# Altium PCB Driver.PcbDoc
Units mm, origin at the board's own origin, x right, y up, seen from the top; angles counter-clockwise.
Board outline 292.75 x 147.5 mm, 2 copper layers (Top Layer, Bottom Layer); 109 components, 164 nets, 482 pads, 0 vias.
Unrouted connection lines stored in the file: 143.
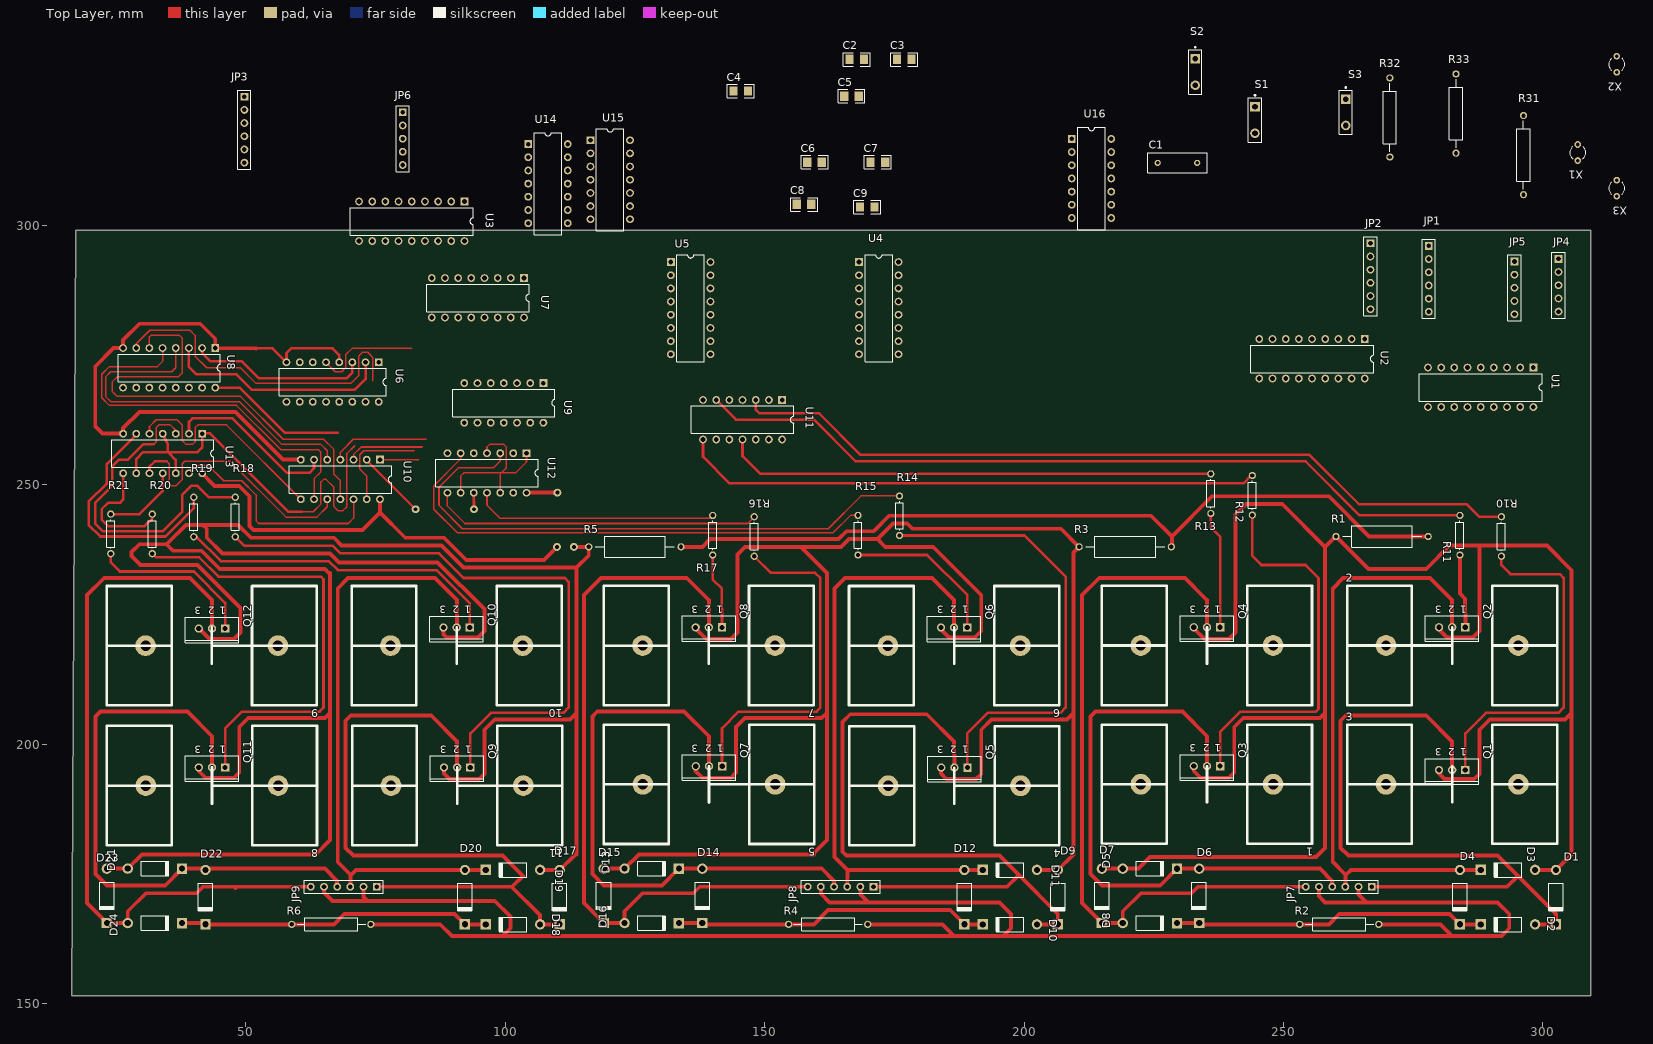
[diagram p0: Top Layer view]
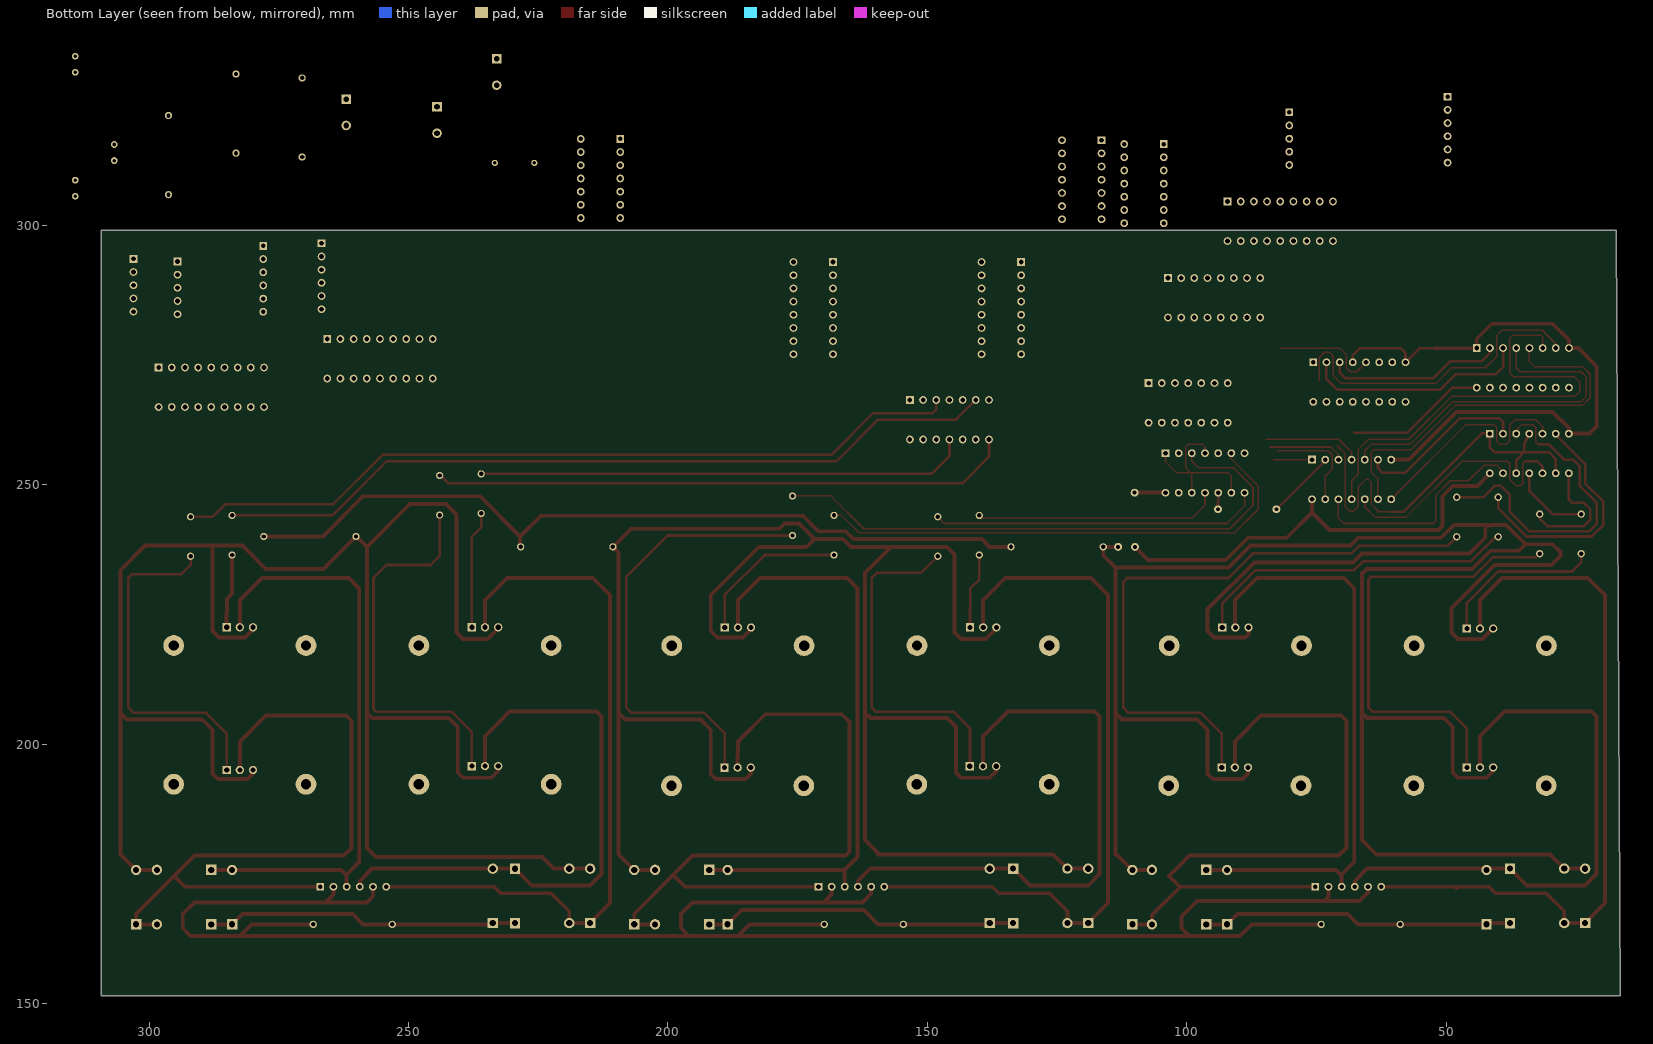
[diagram p1: Bottom Layer view, seen from below]

## Layer stack, top to bottom
Top Layer: signal copper 0.0356
Dielectric: dielectric 0.32, FR-4, Dk 4.8
Bottom Layer: signal copper 0.0356

## Board outline
17.25,299 309.25,299 309.25,151.5 16.5,151.5

## Design rules (kind name [scope] priority, off if disabled: settings)
Clearance [All] p1: gap=0.254
ComponentClearance [All] p1: gap=0.254 collisioncheckmode=0
PolygonConnect [All] p1: connectstyle=Relief reliefconductorwidth=0.254 reliefentries=4 polygonreliefangle="90 Angle"
RoomDefinition Driver [InComponentClass('Driver')] p1: confinementstyle=ConfineIn formatcopy=TRUE outline 225.262,383.686 276.062,383.686 276.062,409.086 225.262,409.086
RoutingLayers [All] p1: top layer=Any bottom layer="Not Used"
RoutingVias [All] p1: holewidth=0.711 width=1.27 viastyle="Through Hole" minholewidth=0.711 minwidth=1.27 maxholewidth=0.711 maxwidth=1.27
SolderMaskExpansion [All] p1: expansion=0.102
TestPointUsage [All] p1: valid=0 allowmultiple=FALSE
Testpoint [All] p1: side=15 testpointundercomponent=TRUE minsize=1.016 maxsize=2.54 preferedsize=1.524 minholesize=0 maxholesize=1.016 preferedholesize=0.813 testpointgrid=0.025 style=1023 order=-539222988
Width [All] p1: maxlimit=25 minlimit=0.254 preferedwidth=0.254 toplayer_prefwidth=0.5 bottomlayer_maxwidth=2.54 minimp=50.000000 maximp=50.000000 favimp=50.000000
16 further rules are at their usual default settings.

## Components (designator, comment, footprint, x,y, rotation, side; value= is the part's Value field where it differs from the comment)
1 "" "Heat Sink" 258,202.25 r180 top
2 "" "Heat Sink" 259.75,209 r0 top
3 "" "Heat Sink" 259.75,182.25 r0 top
4 "" "Heat Sink" 209.322,201.962 r180 top
5 "" "Heat Sink" 162.04,202.232 r180 top
6 "" "Heat Sink" 209.268,228.962 r180 top
7 "" "Heat Sink" 162.002,228.982 r180 top
8 "" "Heat Sink" 66.25,202 r180 top
9 "" "Heat Sink" 66.214,228.954 r180 top
10 "" "Heat Sink" 113.402,228.962 r180 top
11 "" "Heat Sink" 113.5,202 r180 top
C1 "" RAD-0.3 225.75,312 r0 top
C2 "PIC16C84-04/P" C3216-1206 167.762,331.96 r0 top
C3 "PIC16C84-04/P" C3216-1206 176.906,331.96 r0 top
C4 "XTAL" C3216-1206 145.41,325.864 r0 top
C5 "XTAL" C3216-1206 166.746,324.848 r0 top
C6 "XTAL" C3216-1206 159.634,312.148 r0 top
C7 "XTAL" C3216-1206 171.826,312.148 r0 top
C8 "XTAL" C3216-1206 157.602,304.02 r0 top
C9 "XTAL" C3216-1206 169.794,303.512 r0 top
D1 "1N4004" DIO10.46-5.3x2.8 302.5,170.5 r270 top
D2 "1N4004" DIO10.46-5.3x2.8 293.25,165.25 r180 top
D3 "1N4004" DIO10.46-5.3x2.8 293.25,175.75 r180 top
D4 "1N4004" DIO10.46-5.3x2.8 284,170.5 r270 top
D5 "1N4004" DIO10.46-5.3x2.8 224.25,175.98 r0 top
D6 "1N4004" DIO10.46-5.3x2.8 233.75,170.75 r270 top
D7 "1N4004" DIO10.46-5.3x2.8 215,170.75 r270 top
D8 "1N4004" DIO10.46-5.3x2.8 224.25,165.5 r0 top
D9 "1N4004" DIO10.46-5.3x2.8 206.5,170.5 r270 top
D10 "1N4004" DIO10.46-5.3x2.8 197.25,165.25 r180 top
D11 "1N4004" DIO10.46-5.3x2.8 197.25,175.75 r180 top
D12 "1N4004" DIO10.46-5.3x2.8 188.5,170.5 r270 top
D13 "1N4004" DIO10.46-5.3x2.8 128.25,176 r0 top
D14 "1N4004" DIO10.46-5.3x2.8 138,170.75 r270 top
D15 "1N4004" DIO10.46-5.3x2.8 119,170.75 r270 top
D16 "1N4004" DIO10.46-5.3x2.8 128.25,165.5 r0 top
D17 "1N4004" DIO10.46-5.3x2.8 110.5,170.5 r270 top
D18 "1N4004" DIO10.46-5.3x2.8 101.5,165.25 r180 top
D19 "1N4004" DIO10.46-5.3x2.8 101.5,175.75 r180 top
D20 "1N4004" DIO10.46-5.3x2.8 92.25,170.5 r270 top
D21 "1N4004" DIO10.46-5.3x2.8 32.5,176 r0 top
D22 "1N4004" DIO10.46-5.3x2.8 42.25,170.5 r270 top
D23 "1N4004" DIO10.46-5.3x2.8 23.25,170.75 r270 top
D24 "1N4004" DIO10.46-5.3x2.8 32.5,165.5 r0 top
JP1 "Header 6" HDR1X6 278,296 r270 top
JP2 "Header 6" HDR1X6 266.75,296.5 r270 top
JP3 "Header 6" HDR1X6 49.75,324.75 r270 top
JP4 "Header 5" HDR1X5 303,293.5 r270 top
JP5 "Header 5" HDR1X5 294.5,293 r270 top
JP6 "Header 5" HDR1X5 80.25,321.75 r270 top
JP7 "Header 6" HDR1X6 267,172.5 r180 top
JP8 "Header 6" HDR1X6 171,172.5 r180 top
JP9 "Header 6" HDR1X6 75.25,172.5 r180 top
Q1 "MJE15030" SFM-T3/X1.6V 282.5,195 r180 top
Q2 "MJE15030" SFM-T3/X1.6V 282.5,222.5 r180 top
Q3 "MJE15030" SFM-T3/X1.6V 235.25,195.75 r180 top
Q4 "MJE15030" SFM-T3/X1.6V 235.25,222.5 r180 top
Q5 "MJE15030" SFM-T3/X1.6V 186.572,195.462 r180 top
Q6 "MJE15030" SFM-T3/X1.6V 186.518,222.462 r180 top
Q7 "MJE15030" SFM-T3/X1.6V 139.29,195.732 r180 top
Q8 "MJE15030" SFM-T3/X1.6V 139.252,222.482 r180 top
Q9 "MJE15030" SFM-T3/X1.6V 90.75,195.5 r180 top
Q10 "MJE15030" SFM-T3/X1.6V 90.652,222.462 r180 top
Q11 "MJE15030" SFM-T3/X1.6V 43.5,195.5 r180 top
Q12 "MJE15030" SFM-T3/X1.6V 43.5,222.25 r180 top
R1 "" AXIAL-0.7 269,240 r0 top
R2 "" AXIAL-0.6 260.75,165.25 r0 top
R3 "Rsense" AXIAL-0.7 219.5,238 r0 top
R4 "1N4004" AXIAL-0.6 162.25,165.25 r0 top
R5 "Rsense" AXIAL-0.7 125,238 r0 top
R6 "1N4004" AXIAL-0.6 66.5,165.25 r0 top
R10 "1K" AXIAL-0.3 292,240 r270 top
R11 "1K" AXIAL-0.3 284,240.25 r270 top
R12 "1K" AXIAL-0.3 244,247.94 r270 top (schematic designator R11)
R13 "NPN3" AXIAL-0.3 236,248.25 r90 top
R14 "1K" AXIAL-0.3 176,244 r270 top
R15 "1K" AXIAL-0.3 168,240.25 r270 top (schematic designator R18)
R16 "Res1" AXIAL-0.3 148,240 r270 top (schematic designator R13)
R17 "Res1" AXIAL-0.3 140,240.25 r90 top (schematic designator R13)
R18 "NPN3" AXIAL-0.3 48,243.75 r270 top
R19 "1K" AXIAL-0.3 40,243.75 r270 top (schematic designator R18)
R20 "1K" AXIAL-0.3 32,240.5 r270 top (schematic designator R18)
R21 "1K" AXIAL-0.3 24,240.5 r270 top (schematic designator R18)
R31 "Res Adj2" AXIAL-0.6 296.25,313.5 r270 top
R32 "Res Adj2" AXIAL-0.6 270.5,320.75 r270 top
R33 "Res Adj2" AXIAL-0.6 283.25,321.5 r270 top
S1 "Home" SPST-2 244.5,320.25 r270 top
S2 "Home" SPST-2 233,329.5 r270 top
S3 "Home" SPST-2 262,321.75 r270 top
U1 "PIC16C84-04/P" DIP-18 288,268.75 r180 top
U2 "PIC16C84-04/P" DIP-18 255.5,274.25 r180 top
U3 "PIC16C84-04/P" DIP-18 82,300.75 r180 top
U4 "DM74LS191N" DIP-16 172,284 r270 top
U5 "DM74LS191N" DIP-16 135.75,284 r270 top
U6 "DM74LS191N" DIP-16 66.75,269.75 r180 top
U7 "SN74LS139AN" DIP-16/X1.5 94.75,286 r180 top
U8 "SN74LS139AN" DIP-16/X1.5 35.25,272.5 r180 top
U9 "SN74LS04N" DIP-14/D19.7 99.75,265.75 r180 top
U10 "SN74LS04N" DIP-14/D19.7 68.25,251 r180 top
U11 "SN74LS08N" DIP-14/D19.7 145.75,262.5 r180 top
U12 "SN74LS08N" DIP-14/D19.7 96.5,252.25 r180 top
U13 "SN74LS08N" DIP-14/D19.7 34,256 r180 top
U14 "SN74LS08N" DIP-14/D19.7 108.25,308 r270 top
U15 "LM339N" DIP-14/D19.7 120.25,308.75 r270 top
U16 "DM74LS05N" DIP-14/D19.7 213,309 r270 top
X1 "11.059MHz" BCY-W2/D3.1 306.708,313.994 r0 top
X2 "11.059MHz" BCY-W2/D3.1 314.224,330.998 r0 top
X3 "11.059MHz" BCY-W2/D3.1 314.224,307.122 r0 top
? "" "Heat Sink" 258,229 r180 top

## Footprints (in the part's own frame and the unit in brackets; to place one, negate y for a bottom-side part, rotate by r counter-clockwise, add the part's x,y. Pads: shape width x height; smd on the part's side, far side on the other; paste and mask are expansions set on the pad)
AXIAL-0.3 [mm]
  round 1.4 hole 0.85: 1(-3.81,0) 2(3.81,0)
  silkscreen extent -2.77,-0.76 2.77,0.76
AXIAL-0.6 [mm]
  round 1.4 hole 0.85: 1(-7.62,0) 2(7.62,0)
  silkscreen extent -6.6,-1.27 6.6,1.27
AXIAL-0.7 [mm]
  round 1.4 hole 0.85: 1(-8.89,0) 2(8.89,0)
  silkscreen extent -7.62,-2.03 7.62,2.03
BCY-W2/D3.1 [mm]
  round 1.3 hole 0.7: 1(0,1.55) 2(0,-1.55)
  silkscreen extent -1.55,-1.19 1.55,1.17
C3216-1206 [mm]
  rect 1.6x1.8 smd: 1(-1.4,0) 2(1.4,0)
  silkscreen extent -2.6,-1.3 2.6,1.3
DIO10.46-5.3x2.8 [mm]
  round 2 hole 1.2: 1(-5.23,0)
  rect 2x2 hole 1.2: 2(5.23,0)
  silkscreen extent -2.65,-1.4 2.75,1.4
DIP-14/D19.7 [mm]
  rect 1.5x1.5 hole 0.9: 1(-7.62,-3.81)
  round 1.5 hole 0.9: 2(-5.08,-3.81) 3(-2.54,-3.81) 4(0,-3.81) 5(2.54,-3.81) 6(5.08,-3.81) 7(7.62,-3.81) 8(7.62,3.81) 9(5.08,3.81) 10(2.54,3.81) 11(0,3.81) 12(-2.54,3.81) 13(-5.08,3.81) 14(-7.62,3.81)
  silkscreen extent -9.85,-2.65 9.85,2.65
DIP-16 [mm]
  rect 1.5x1.5 hole 0.9: 1(-8.89,-3.81)
  round 1.5 hole 0.9: 2(-6.35,-3.81) 3(-3.81,-3.81) 4(-1.27,-3.81) 5(1.27,-3.81) 6(3.81,-3.81) 7(6.35,-3.81) 8(8.89,-3.81) 9(8.89,3.81) 10(6.35,3.81) 11(3.81,3.81) 12(1.27,3.81) 13(-1.27,3.81) 14(-3.81,3.81) 15(-6.35,3.81) 16(-8.89,3.81)
  silkscreen extent -10.3,-2.65 10.3,2.65
DIP-16/X1.5 [mm]
  rect 1.5x1.5 hole 0.9: 1(-8.89,-3.81)
  round 1.5 hole 0.9: 2(-6.35,-3.81) 3(-3.81,-3.81) 4(-1.27,-3.81) 5(1.27,-3.81) 6(3.81,-3.81) 7(6.35,-3.81) 8(8.89,-3.81) 9(8.89,3.81) 10(6.35,3.81) 11(3.81,3.81) 12(1.27,3.81) 13(-1.27,3.81) 14(-3.81,3.81) 15(-6.35,3.81) 16(-8.89,3.81)
  silkscreen extent -9.85,-2.65 9.85,2.65
DIP-18 [mm]
  rect 1.5x1.5 hole 0.9: 1(-10.16,-3.81)
  round 1.5 hole 0.9: 2(-7.62,-3.81) 3(-5.08,-3.81) 4(-2.54,-3.81) 5(0,-3.81) 6(2.54,-3.81) 7(5.08,-3.81) 8(7.62,-3.81) 9(10.16,-3.81) 10(10.16,3.81) 11(7.62,3.81) 12(5.08,3.81) 13(2.54,3.81) 14(0,3.81) 15(-2.54,3.81) 16(-5.08,3.81) 17(-7.62,3.81) 18(-10.16,3.81)
  silkscreen extent -11.85,-2.65 11.85,2.65
HDR1X5 [mm]
  rect 1.5x1.5 hole 0.9: 1(0,0)
  round 1.5 hole 0.9: 2(2.54,0) 3(5.08,0) 4(7.62,0) 5(10.16,0)
  silkscreen extent -1.27,-1.27 11.43,1.27
HDR1X6 [mm]
  rect 1.5x1.5 hole 0.9: 1(0,0)
  round 1.5 hole 0.9: 2(2.54,0) 3(5.08,0) 4(7.62,0) 5(10.16,0) 6(12.7,0)
  silkscreen extent -1.27,-1.27 13.97,1.27
"Heat Sink" [mm]
  round 4 hole 2: 0(35.5,10) 2(10,10)
  silkscreen extent 2.5,-1.5 43,21.5
RAD-0.3 [mm]
  round 1.2 hole 0.7: 1(0,0) 2(7.62,0)
  silkscreen extent -1.91,-1.9 9.52,1.91
SFM-T3/X1.6V [mm]
  rect 1.6x1.6 hole 1: 1(-2.54,0)
  round 1.6 hole 1: 2(0,0) 3(2.54,0)
  silkscreen extent -5.15,-2.2 5.15,2.7
SPST-2 [mm]
  rect 1.85x1.85 hole 1.1: 1(-2.54,0)
  round 1.85 hole 1.1: 2(2.54,0)
  silkscreen extent -4.89,-1.27 4.28,1.27

## Part data
D1 D2 D3 D4 D5 D6 D7 D8 D9 D10 D11 D12 D13 D14 D15 D16 D17 D18 D19 D20 D21 D22 D23 D24: "1.0 Ampere General Purpose Rectifier"
JP1 JP2 JP3 JP7 JP8 JP9: "Header, 6-Pin"
JP4 JP5 JP6: "Header, 5-Pin"
Q1 Q2 Q3 Q4 Q5 Q6 Q7 Q8 Q9 Q10 Q11 Q12: "Complementary Silicon Plastic Power Transistor"
R10 R13 R14 R15 R18 R19 R20 R21: library part Res1, "Resistor"
R11 R12: library part res1, "Resistor"
R16 R17: "Resistor"
R31 R32 R33: "Variable Resistor"
S1 S2 S3: library part SW-SPST, "Single-Pole, Single-Throw Switch"
U1 U2 U3: "EPROM-Based 8-Bit CMOS Microcontroller"
U4 U5 U6: "Synchronous 4-Bit Up/Down Counter with Mode Control"
U7 U8: "Dual 2-Line to 4-Line Decoder / Demultiplexer"
U9 U10: "Hex Inverter"
U11 U12 U13 U14: "Quadruple 2-Input Positive-AND Gate"
U15: "Quad Single-Supply Comparator"
U16: "Hex Inverter with Open-Collector Output"
X1 X2 X3: library part XTAL, "Crystal Oscillator"

## Free pads (board coordinates)
  round 1.524 hole 0.762: 0(113.25,238) 2(110,238) 3(110.06,248.44) 4(82.75,245.25) 5(94,245.25)

## Nets (pads, with @x,y where several pads share a name; then routed paths per layer and width w, separated by ;. In a path a pad name is that pad's centre, name@x,y a point inside that pad or via, vN(x,y) a via of type N, cw(c..) or ccw(c..) an arc to the next point about the centre after c; other vN are vias at no path point)
+5V: 
+5V: 
+5V: 
+5V: 
+5V: 
+5V: 
+5V: 
+5V: 
+12V: JP7.2 JP7.5 JP8.2 JP8.5 JP9.2 JP9.5 R2.2 R4.2 R6.2 | length 394.4
  Top Layer w0.75: JP9.5 65.09,171.41 66.75,169.75 73.5,169.75 ; JP9.2 72.71,170.54 73.5,169.75 ; R6.2 87.5,165.25 89.75,163 99.5,163 ; JP8.5 160.84,171.16 162.5,169.5 170,169.5 ; JP8.2 168.46,171.04 170,169.5 ; R4.2 184.25,165.25 186.5,163 ; JP7.5 256.84,170.66 258,169.5 266,169.5 ; JP7.2 264.46,171.04 266,169.5 ; R2.2 280.25,165.25 282.5,163 ; 73.5,169.75 98,169.75 101,166.75 101,164.5 99.5,163 ; 99.5,163 186.5,163 ; 170,169.5 195.25,169.5 197.5,167.25 197.5,164.5 196,163 ; 186.5,163 196,163 ; 196,163 282.5,163 ; 266,169.5 291.25,169.5 293.5,167.25 293.5,164.5 292,163 282.5,163
+12V: 
+12V: 
+12V: 
+12V: 
+12V: 
+12V: 
+12V: 
+12V: 
+12V: 
"CLOCK PIC1": JP1.6 U1.6
"CLOCK PIC2": JP2.6 U2.6
"CLOCK PIC3": JP3.6 U3.6
"COIL OFF": U1.12 U2.12 U3.12 U14.1 U14.4 U14.9
"DATA IN PIC1": JP1.5 U1.7
"DATA IN PIC2": JP2.5 U2.7
"DATA IN PIC3": JP3.5 U3.8
"DATA OUT PIC1": JP1.2 U1.9
"DATA OUT PIC2": JP2.2 U2.9
"DATA OUT PIC3": JP3.2 U3.7
GND: C1.1 C2.1 C3.1 C4.1 C5.1 C6.1 C7.1 C8.1 C9.1 R1.2 R3.2 R5.2 R31.1 R32.1 R33.1 S1.1 S2.1 S3.1 U1.5 U2.5 U3.5 U4.4 U4.8 U5.4 U5.8 U6.4 U6.8 U7.1 U7.8 U7.15 U8.1 U8.8 U9.7 U10.7 U11.7 U12.7 U13.7 U14.7 U15.12 U16.7 | length 273.6
  Top Layer w0.5: 52,276.25 55.17,276.25 U6.8 57.86,275.36 58.75,276.25 66.75,276.25 68.02,274.98 U6.4
  Top Layer w0.75: 52,276.25 U8.1 44.14,278.11 41.25,281 29.5,281 26.36,277.86 U8.8 24.56,276.31 21,272.75 21,261.19 21.06,261.19 22.44,259.81 U13.7 26.38,260.88 29.5,264 48,264 57.19,254.81 U10.7 ; R5.2 138,238 139.5,239.5 164.25,239.5 165.75,241 171,241 ; 171.25,241.25 174,244 224.5,244 228.5,240 ; R3.2@228.5,238.11 228.5,240 ; R1.2 266.5,240 258.75,247.75 236.25,247.75 228.5,240
"HOME PIC1": JP1.3 U1.13
"HOME PIC2": JP2.3 U2.13
"HOME PIC3": JP3.3 U3.9
NetB1A_1: D3.2 D4.1 JP7.3 Q2.2 | length 115.6
  Top Layer w0.75: JP7.3 261.92,174.67 262,174.75 ; Q2.2@282.5,222.75 282.5,227.75 278.25,232 261.5,232 259.5,230 259.5,177.25 262,174.75 ; D4.1 D4.1@284,175.75 ; D3.2 D4.1@284,175.75 ; 262,174.75 263,175.75 D4.1@284,175.75
NetB1A_2: D1.2 D2.1 JP7.1 Q1.2 | length 135.8
  Top Layer w0.75: JP7.1 293.1,172.5 295.175,174.575 ; Q1.2 282.5,200.5 277.5,205.5 262,205.5 261,204.5 261,180 262.5,178.5 291.25,178.5 295.175,174.575 ; D2.1 302.48,165.25 D1.2 302.5,167.25 295.175,174.575
NetB1B_1: D7.2 D8.1 JP7.6 Q4.2 | length 140.7
  Top Layer w0.75: Q4.2 235.25,227.75 235,228 231,232 214.5,232 211.188,228.688 211.188,169.332 D7.2 219,165.52 D8.1 219.02,167.77 222.5,171.25 232.25,171.25 233.5,172.5 JP7.6
NetB1B_2: D5.2 D6.1 JP7.4 Q3.2 | length 111.8
  Top Layer w0.75: Q3.2 235.25,201.5 230.5,206.25 213.75,206.25 212.815,205.315 212.815,174.935 215,172.75 226.25,172.75 D5.2 D6.1 257.02,175.98 259.38,173.62 JP7.4
NetB2A_1: D11.2 D12.1 JP8.3 Q6.2 | length 115.5
  Top Layer w0.75: JP8.3 166,175.75 ; Q6.2 186.518,227.732 182.25,232 165.5,232 163.5,230 163.5,178.25 166,175.75 ; D12.1 D12.1@188.5,175.75 ; D11.2 D12.1@188.5,175.75 ; 166,175.75 D12.1@188.5,175.75
NetB2A_2: D9.2 D10.1 JP8.1 Q5.2 | length 135.7
  Top Layer w0.75: JP8.1 196.744,172.5 198.997,174.753 ; Q5.2 186.5,200.5 181.25,205.75 166.5,205.75 165,204.25 165,179.25 165.75,178.5 195.25,178.5 198.997,174.753 ; D10.1 206.48,165.25 D9.2 206.5,167.25 198.997,174.753
NetB2B_1: D15.2 D16.1 JP8.6 Q8.2 | length 140.7
  Top Layer w0.75: Q8.2 139.25,222.5 139.25,227.75 139,228 135,232 118.5,232 115.188,228.688 115.188,169.332 D15.2 123,165.52 D16.1 123.02,167.77 126.5,171.25 136.25,171.25 137.5,172.5 JP8.6
NetB2B_2: D13.2 D14.1 JP8.4 Q7.2 | length 111.9
  Top Layer w0.75: D13.2 D13.2@133.48,175.98 ; Q7.2 139.25,195.75 139.25,201.5 134.5,206.25 117.75,206.25 116.815,205.315 116.815,174.935 119,172.75 130.25,172.75 130.25,172.77 133.46,175.98 D13.2@133.48,175.98 ; JP8.4 163.38,173.62 161.02,175.98 D14.1 D13.2@133.48,175.98
NetB3A_1: D19.2 D20.1 JP9.3 Q10.2 | length 115.7
  Top Layer w0.75: JP9.3 70.17,174.67 ; Q10.2@90.75,222.75 90.75,227.75 86.5,232 69.75,232 67.75,230 67.75,177.25 70.25,174.75 70.17,174.67 ; D20.1 D20.1@92.25,175.75 ; D19.2 D20.1@92.25,175.75 ; 70.17,174.67 71.25,175.75 D20.1@92.25,175.75
NetB3A_2: D17.2 D18.1 JP9.1 Q9.2 | length 132.9
  Top Layer w0.75: JP9.1 101.35,172.5 ; Q9.2@90.75,195 Q9.2 90.75,200.5 85.75,205.5 70.25,205.5 69.25,204.5 69.25,180 70.75,178.5 99.5,178.5 103.425,174.575 101.35,172.5 ; D17.2 D17.2@110.5,165.25 ; D17.2@110.73,165.25 D17.2@110.5,165.25 ; 101.35,172.5 101.35,172.4 106.73,167.02 D18.1 D17.2@110.5,165.25
NetB3B_1: D23.2 D24.1 JP9.6 Q12.2 | length 141
  Top Layer w0.75: D24.1@27.25,165.52 D23.2 19.438,169.332 19.438,228.688 22.75,232 39.25,232 43.5,227.75 Q12.2@43.5,222.5 ; D24.1 27.27,167.77 30.75,171.25 40.5,171.25 41.75,172.5 48,172.5 ; 48,172.25 48,172.5 ; JP9.6 48,172.5
NetB3B_2: D21.2 D22.1 JP9.4 Q11.2 | length 111.8
  Top Layer w0.75: D21.2 D21.2@37.73,175.98 ; Q11.2@43.5,195.75 43.5,201.5 38.75,206.25 22,206.25 21.065,205.315 21.065,174.935 23.25,172.75 34.5,172.75 D21.2@37.73,175.98 ; JP9.4 67.63,173.62 65.27,175.98 42.25,175.98 D21.2@37.73,175.98
NetC4_2: C4.2 U1.15 X1.2
NetC5_2: C5.2 U1.16 X1.1
NetC6_2: C6.2 U2.15 X2.2
NetC7_2: C7.2 U2.16 X2.1
NetC8_2: C8.2 U3.15 X3.2
NetC9_2: C9.2 U3.16 X3.1
NetD1_1: D1.1 D3.1 D5.1 D7.1 Q1.3 Q2.3 Q3.3 Q4.3 R1.1 U15.4 | length 373.5
  Top Layer w0.75: D7.1 D5.1 219.02,176.02 222.02,176.02 224.25,178.25 256.25,178.25 258,180 258,238 ; Q3.3 232.71,194.79 234,193.5 239.5,193.5 240.5,194.5 240.5,203.25 242.25,205 257,205 258,206 ; Q4.3 232.71,222.29 234.75,220.25 239.5,220.25 240.75,221.5 240.75,240 240.75,244.25 242.75,246.25 249.75,246.25 258,238 ; Q1.3@279.96,194.29 281,193.25 286.75,193.25 287.75,194.25 287.75,202.75 289.75,204.75 304.25,204.75 305.5,206 ; Q2.3 279.96,222.04 281.5,220.5 286.5,220.5 287.75,221.75 287.75,238.25 ; D3.1 D1.1@302.48,175.75 ; D1.1 302.5,175.75 305.5,178.75 305.5,233.5 300.75,238.25 282,238.25 277.5,233.75 266.36,233.75 R1.1 260,240 258,238
NetD2_2: D2.2 D4.2 D6.2 D8.2 R2.1 | length 60.7
  Top Layer w0.75: D8.2 233.73,165.5 233.98,165.25 R2.1 ; R2.1@252.88,165.5 R2.1 ; D2.2 284.02,165.25 D4.2 282.02,167.25 260.75,167.25 258.75,165.25 R2.1
NetD9_1: D9.1 D11.1 D13.1 D15.1 Q5.3 Q6.3 Q7.3 Q8.3 R3.1 U15.6 | length 381.7
  Top Layer w0.75: D15.1 123,175.98 D13.1 125.77,178.75 ; 125.75,178.75 159.5,178.75 ; Q8.3@136.71,222.29 138.75,220.25 143.5,220.25 144.75,221.5 144.75,236.5 146.25,238 164.75,238 166.25,239.5 171.75,239.5 ; Q7.3 136.71,195.75 136.71,195.732 136.71,194.79 138,193.5 143.5,193.5 144.5,194.5 144.5,203.25 146.25,205 161,205 162,206 ; 157,238 162,233 162,181.5 159.25,178.75 ; Q6.3@183.96,222.04 185.5,220.5 190.5,220.5 191.75,221.75 191.75,228.75 182.5,238 173.25,238 171.75,239.5 ; Q5.3 183.96,195.39 183.96,194.29 185,193.25 190.75,193.25 191.75,194.25 191.75,202.75 193.75,204.75 208.25,204.75 209.5,206 ; D11.1 206.48,175.75 D9.1 206.5,175.75 209.5,178.75 209.5,206 ; 171.75,239.5 174.75,242.5 177.5,242.5 178.5,241.5 207.11,241.5 R3.1 209.5,236.89 209.5,234.5 209.5,206
NetD10_2: D10.2 D12.2 D14.2 D16.2 R4.1 | length 60.9
  Top Layer w0.75: D16.2 137.98,165.5 138.23,165.25 R4.1 159.5,165.25 162.25,168 185.77,168 D12.2 188.52,165.25 D10.2
NetD17_1: D17.1 D19.1 D21.1 D23.1 pad.0 Q9.3 Q10.3 Q11.3 Q12.3 R5.1 U15.8 | length 483.9
  Top Layer w0.75: D23.1 27.27,175.98 D21.1 27.27,176.02 30,178.75 63.5,178.75 66.25,181.5 66.25,206 ; Q11.3 40.96,194.79 42.25,193.5 47.75,193.5 48.75,194.5 48.75,203.25 50.5,205 65.25,205 66.25,206 ; Q12.3 40.96,222.29 40.98,222.27 43,220.25 47.75,220.25 49,221.5 49,226.25 40.75,234.5 29.75,234.5 28,236.25 28,237 29.5,238.5 34.75,238.5 ; 41.75,242.25 42.5,241.5 42.5,239.75 45.5,236.75 66.25,236.75 68,235 87,235 96,226 96,221.75 94.75,220.5 88.75,220.5 88.112,221.138 Q10.3 ; Q9.3 88.21,194.29 89.25,193.25 95,193.25 96,194.25 96,202.75 98,204.75 112.5,204.75 113.75,206 ; D19.1 D17.1@110.5,175.75 ; D17.1 D17.1@110.5,175.75 ; pad.0 R5.1 116.11,236.36 113.75,234 ; 34.75,238.5 38.5,242.25 48.5,242.25 51,239.75 67,239.75 68.5,238.25 87.75,238.25 92,234 113.75,234 ; 34.75,238.5 36,237.25 41.5,237.25 45,233.75 65.25,233.75 66,233 66.25,233 66.25,206 ; D17.1@110.5,175.75 110.52,175.75 113.52,178.75 113.75,178.75 113.75,206 ; 113.75,206 113.75,232.25 113.75,234
NetD18_2: D18.2 D20.2 D22.2 D24.2 R6.1 | length 59.9
  Top Layer w0.75: D24.2 D22.2@41.98,165.5 ; D22.2@42.23,165.25 D22.2@42.25,165.25 ; D22.2 D22.2@42.25,165.25 ; D20.2 90.27,167.25 69,167.25 67,165.25 R6.1 D22.2@42.25,165.25 ; D20.2@92.27,165.25 D18.2
NetJP4_1: JP4.1 U1.3
NetJP4_2: JP4.2 U1.2
NetJP4_3: JP4.3 U1.1
NetJP4_4: JP4.4 U1.18
NetJP4_5: JP4.5 U1.17
NetJP5_1: JP5.1 U2.3
NetJP5_2: JP5.2 U2.2
NetJP5_3: JP5.3 U2.1
NetJP5_4: JP5.4 U2.18
NetJP5_5: JP5.5 U2.17
NetJP6_1: JP6.1 U3.3
NetJP6_2: JP6.2 U3.2
NetJP6_3: JP6.3 U3.1
NetJP6_4: JP6.4 U3.18
NetJP6_5: JP6.5 U3.17
NetQ1_1: C1.2 C2.2 C3.2 Q1.1 R10.2 U1.14 U2.14 U3.14 U5.16 | length 67.8
  Top Layer w0.5: Q1.1 285.04,202.04 289,206 303,206 304,207 304,230.5 304,232 303.25,232.75 293.75,232.75 292,234.5 R10.2
NetQ1_2: 
NetQ2_1: Q2.1 R11.2 | length 14.4
  Top Layer w0.75: R11.2 284,229 285,228 Q2.1
NetQ2_2: 
NetQ3_1: Q3.1 R12.2 | length 75
  Top Layer w0.5: Q3.1 237.79,202.29 241.75,206.25 256.25,206.25 256.75,206.75 256.75,232 254.25,234.5 245.75,234.5 244,236.25 R12.2
NetQ3_2: 
NetQ4_1: Q4.1 R13.1 | length 22.7
  Top Layer w0.5: R13.1 236,241.75 237.79,239.96 Q4.1
NetQ4_2: 
NetQ5_1: Q5.1 R14.2 | length 88.6
  Top Layer w0.5: R14.2 200.06,240.19 208,232.25 208,207 207,206 193,206 189.04,202.04 189.04,195.462 Q5.1@189.04,195
NetQ6_1: Q6.1 R15.2 | length 30.5
  Top Layer w0.5: R15.2 181.31,236.44 189.058,228.692 Q6.1
NetQ6_2: 
NetQ7_1: Q7.1 R16.2 | length 67.2
  Top Layer w0.5: Q7.1 141.79,195.75 141.79,203.04 145,206.25 160,206.25 160.75,207 160.75,232 159.75,233 151.19,233 R16.2@148.19,236
NetQ7_2: 
NetQ8_1: Q8.1 R17.1 | length 14.7
  Top Layer w0.5: R17.1 140,231.75 141.75,230 Q8.1
NetQ8_2: 
NetQ9_1: Q9.1 R18.2 | length 119.7
  Top Layer w0.5: R18.2 49.69,238.25 66.75,238.25 68.25,236.75 87.25,236.75 92,232 111.5,232 112.25,231.25 112.25,230.75 112.25,207 111.25,206 97.25,206 93.29,202.04 Q9.1
NetQ10_1: Q10.1 R19.2 | length 63.1
  Top Layer w0.5: R19.2 40.56,239.94 45.25,235.25 66,235.25 67.75,233.5 86.75,233.5 93.192,227.058 Q10.1
NetQ10_2: 
NetQ11_1: Q11.1 R20.2 | length 87.7
  Top Layer w0.5: R20.2 32.69,236 41,236 44.75,232.25 64.5,232.25 65,231.75 65,230.75 65,207 64.25,206.25 49.25,206.25 46.04,203.04 Q11.1@46.04,195.75
NetQ11_2: 
NetQ12_1: Q12.1 R21.2 | length 31.9
  Top Layer w0.5: R21.2 24,235 25.75,233.25 40,233.25 46.04,227.21 Q12.1
NetQ12_2: 
NetR7_1: U14.2 U15.2
NetR8_1: U14.5 U15.1
NetR9_1: U14.10 U15.14
NetR10_1: R10.1 U11.3 | length 154.1
  Top Layer w0.5: U11.3 148.29,264.46 149,263.75 160.5,263.75 168.5,255.75 255,255.75 264.5,246.25 285.25,246.25 287.69,243.81 R10.1
NetR11_1: R11.1 U11.6 | length 152.8
  Top Layer w0.5: U11.6@140.5,266.48 144.48,262.5 159.5,262.5 167.5,254.5 254.25,254.5 264.69,244.06 R11.1
NetR12_1: R12.1 U11.8 | length 111.9
  Top Layer w0.5: U11.8 138.13,255.37 143.25,250.25 242.25,250.25 243.75,251.75 R12.1
NetR13_2: R13.2 U11.11 | length 94.9
  Top Layer w0.5: U11.11 145.75,255.5 149.19,252.06 R13.2
NetR14_1: R14.1 U12.3 | length 112.4
  Top Layer w0.3: U12.3 99.04,254.54 97.75,253.25 91,253.25 87.25,249.5 87.25,246 91.75,241.5 162.25,241.5 168.56,247.81 R14.1 R14.1@176,247.5
NetR15_1: R15.1 U12.6 | length 97.9
  Top Layer w0.3: U12.6 91.42,254.92 86.25,249.75 86.25,245.25 90.75,240.75 163.25,240.75 166.56,244.06 R15.1
NetR16_1: R16.1 U12.8 | length 63.7
  Top Layer w0.3: U12.8 88.88,245.87 92.25,242.5 146.75,242.5 148,243.75 R16.1
NetR17_2: R17.2 U12.11 | length 47.7
  Top Layer w0.3: U12.11 96.5,246 99,243.5 139.5,243.5 140,244 R17.2
  Top Layer w0.5: R17.2@139.56,244.06 R17.2
NetR18_1: R18.1 U13.3 | length 64.7
  Top Layer w0.3: 32.25,257.75 32.75,258.25 32.75,261 33.25,261.5 35.5,261.5 36.54,260.46 U13.3
  Top Layer w0.5: 32.25,257.75 30.25,257.75 27.25,254.75 25.5,254.75 24.25,253.5 24.25,249.75 21,246.5 21,242.5 22.5,241 34,241 37.75,244.75 37.75,248 39.5,249.75 40.75,249.75 42.94,247.56 R18.1
NetR19_1: R19.1 U13.6 | length 47.1
  Top Layer w0.5: U13.6@28.92,259.42 U13.6 ; U13.6@28.92,259.67 23.25,254 23.25,250.25 19.75,246.75 19.75,242.25 22,240 34.5,240 40,245.5 R19.1
NetR20_1: R20.1 U13.8 | length 23.7
  Top Layer w0.5: U13.8 26.38,247.13 25.75,246.5 23.5,246.5 22.25,245.25 22.25,243.25 23.5,242 30.5,242 32,243.5 R20.1
NetR21_2: R21.1 U13.11 | length 15.3
  Top Layer w0.5: R21.1 29.56,244.31 34,248.75 U13.11
NetR22_1: R31.2 U15.5
NetR23_1: R32.2 U15.7
NetR25_1: 
NetR26_1: 
NetR27_1: 
NetR28_1: U1.4 U16.2
NetR29_1: U2.4 U16.4
NetR30_1: U3.4 U16.6
NetR33_2: R33.2 U15.9
NetU1_10: U1.10 U4.14
NetU1_11: U1.11 U4.5
NetU2_10: U2.10 U5.14
NetU2_11: U2.11 U5.5
NetU3_10: U3.10 U6.14
NetU3_11: U3.11 U6.5 | length 20.6
  Top Layer w0.3: U6.5 65.48,273.52 67.25,271.75 68.5,271.75 69.25,272.5 69.25,275 70.5,276.25 82,276.25
NetU4_2: U4.2 U7.3
NetU4_3: U4.3 U7.2
NetU5_2: U5.2 U7.13
NetU5_3: U5.3 U7.14
NetU6_2: U6.2 U8.3 | length 43.6
  Top Layer w0.5: U8.3 39.06,272.69 40.5,271.25 48.25,271.25 51.25,268.25 71,268.25 73.1,270.35 U6.2
NetU6_3: U6.3 U8.2 | length 34.5
  Top Layer w0.3: U8.2@41.6,276.15 U8.2
  Top Layer w0.5: U8.2 41.6,275.4 43.25,273.75 49.25,273.75 52.5,270.5 69.5,270.5 70.56,271.56 U6.3
NetU7_4: U7.4 U9.1
NetU7_5: U7.5 U9.3
NetU7_6: U7.6 U9.5
NetU7_7: U7.7 U9.9
NetU7_9: U7.9 U10.3 | length 14.8
  Top Layer w0.3: U10.3 70.79,255.79 72.25,257.25 84,257.25
NetU7_10: U7.10 U10.1 | length 7.4
  Top Layer w0.3: U10.1 83.31,254.81
NetU7_11: U7.11 U9.13
NetU7_12: U7.12 U9.11
NetU8_4: U8.4 U10.5 | length 70.6
  Top Layer w0.3: U8.4 36.52,272.52 35.75,271.75 24,271.75 23,270.75 23,267 24,266 48.75,266 57,257.75 64.5,257.75 65.71,256.54 U10.5
NetU8_5: U8.5 U10.9 | length 76
  Top Layer w0.3: U8.5 33.98,273.73 33,272.75 23.75,272.75 22.25,271.25 22.25,266.75 23.75,265.25 48.25,265.25 56.75,256.75 64,256.75 64.5,256.25 64.5,252.5 63.17,251.17 U10.9
NetU8_6: U8.6 U10.11 | length 89
  Top Layer w0.3: U8.6 31.44,278.44 31.75,278.75 37.25,278.75 37.75,278.25 37.75,271.5 37,270.75 25.25,270.75 24.25,269.75 24.25,268 25.25,267 49,267 57.25,258.75 65,258.75 67,256.75 67,252 68.25,250.75 U10.11
NetU8_7: U8.7 U10.13 | length 83.6
  Top Layer w0.3: U8.7 28.9,277.15 31.5,279.75 39.25,279.75 40.25,278.75 40.25,274.75 42.5,272.5 49,272.5 52,269.5 70.25,269.5 71.75,271 71.75,274.75 72.5,275.5 73.5,275.5 74.486,274.514 74.486,270.014 ; U10.13 73.33,251.67 72,253 72,255.75 72.75,256.5 82.5,256.5
NetU9_2: U9.2 U11.2
NetU9_4: U9.4 U11.5
NetU9_6: U9.6 U11.10
NetU9_8: U9.8 U11.13
NetU9_10: U9.10 U12.2
NetU9_12: U9.12 U12.5
NetU10_2: pad.4 pad.5 U10.2 U12.10 | length 16.7
  Top Layer w0.3: U10.2@73.33,254.67 U10.2
  Top Layer w0.5: U10.2@73.33,254.67 pad.4 ; U12.10 pad.5
NetU10_4: U10.4 U12.13 | length 19
  Top Layer w0.3: U10.4 68.25,256.25 70.75,258.75 84.75,258.75
NetU10_6: U10.6 U13.2 | length 33
  Top Layer w0.5: U13.2 39.08,262.08 39.75,262.75 47.5,262.75 58,252.25 62.25,252.25 63.17,253.17 U10.6
NetU10_8: U10.8 U13.5 | length 43.9
  Top Layer w0.3: U13.5 31.46,261.21 32.75,262.5 36.75,262.5 37.75,261.5 37.75,258.5 38.5,257.75 39.75,257.75 40.25,258.25 40.25,261 40.75,261.5 46.32,261.5 U10.8
NetU10_10: U10.10 U13.10 | length 50.6
  Top Layer w0.3: 34.75,254.5 35.25,254 35.25,250.25 35.75,249.75 36.5,249.75 37.75,251 37.75,254 38.25,254.5 47,254.5 57.75,243.75 63.75,243.75 65.71,245.71 U10.10
  Top Layer w0.5: U13.10 31.46,253.46 32.5,254.5 34.75,254.5
NetU10_12: U10.12 U13.13 | length 44.3
  Top Layer w0.3: U13.13 39.08,252.58 40.25,253.75 42.75,253.75 45.75,250.75 49.25,250.75 52,248 52,243 52.5,242.5 69.75,242.5 70.79,243.54 U10.12
NetU11_1: U11.1 U11.4 U11.9 U11.12 U14.3
NetU12_1: U12.1 U12.4 U12.9 U12.12 U14.6 | length 33
  Top Layer w0.3: U12.9 91.42,251.67 92,252.25 102,252.25 104.12,254.37 U12.1 ; U12.4 96.5,257.25 97,257.75 99.75,257.75 100.25,257.25 100.25,253.25 99.25,252.25 ; U12.12 99.04,251.96
NetU13_1: U13.1 U13.4 U13.9 U13.12 U14.8 | length 84.2
  Top Layer w0.3: 60.75,244.75 63,244.75 64.5,246.25 64.5,250.5 65,251 65.5,251 67,249.5 67,245.75 67.75,245 68.75,245 69.5,245.75 69.5,256 71,257.5
  Top Layer w0.5: U13.9 28.92,254.92 30.25,256.25 35,256.25 ; U13.4 35,257.75 35,256.25 ; U13.12 36.5,252.23 36.5,254.75 35,256.25 ; U13.1 41.62,257.12 40.75,256.25 35,256.25 ; U13.1@41.62,259.87 43.13,259.87 58.25,244.75 60.75,244.75
  Top Layer w0.7: U13.1 U13.1@41.62,259.87
"RESET PIC1": JP1.1 U11.14 U14.14 U16.1
"RESET PIC2": JP2.1 U8.16 U16.3 | length 27.2
  Top Layer w0.5: U8.16 48.81,268.69 57.5,260 67.75,260
"RESET PIC3": JP3.1 U6.16 U16.5
"STATUS PIC1": JP1.4 U1.8 U15.3
"STATUS PIC2": JP2.4 U2.8
"STATUS PIC3": JP3.4 U3.13
VCC: U16.14
VDD: pad.2 pad.3 U4.16 U7.16 U9.14 U10.14 U12.14 U13.14 | length 91
  Top Layer w0.75: U13.14 41.62,252.13 44,249.75 48.75,249.75 50.75,247.75 50.75,242 51.5,241.25 72.5,241.25 75.87,244.62 ; U10.14 75.87,244.63 80.75,239.75 88.25,239.75 92.5,235.5 107.5,235.5 pad.2 ; U12.14 pad.3
pads on no net: 1.0 1.2 2.0 2.2 3.0 3.2 4.0 4.2 5.0 5.2 6.0 6.2 7.0 7.2 8.0 8.2 9.0 9.2 10.0 10.2 11.0 11.2 ?.0 ?.2 S1.2 S2.2 S3.2 U4.1 U4.6 U4.7 U4.9 U4.10 U4.11 U4.12 U4.13 U4.15 U5.1 U5.6 U5.7 U5.9 U5.10 U5.11 U5.12 U5.13 U5.15 U6.1 U6.6 U6.7 U6.9 U6.10 U6.11 U6.12 U6.13 U6.15 U8.9 U8.10 U8.11 U8.12 U8.13 U8.14 U8.15 U14.11 U14.12 U14.13 U15.10 U15.11 U15.13 U16.8 U16.9 U16.10 U16.11 U16.12 U16.13

## Text inside footprints (layer, text, board x,y; h text height)
Q1: Top Overlay "3" at 280.46,199.175 h1.5 r180; Top Overlay "2" at 283,199.175 h1.5 r180; Top Overlay "1" at 285.29,199.175 h1.5 r180
Q2: Top Overlay "1" at 285.29,226.675 h1.5 r180; Top Overlay "2" at 283,226.675 h1.5 r180; Top Overlay "3" at 280.46,226.675 h1.5 r180
Q3: Top Overlay "1" at 238.04,199.925 h1.5 r180; Top Overlay "2" at 235.75,199.925 h1.5 r180; Top Overlay "3" at 233.21,199.925 h1.5 r180
Q4: Top Overlay "1" at 238.04,226.675 h1.5 r180; Top Overlay "2" at 235.75,226.675 h1.5 r180; Top Overlay "3" at 233.21,226.675 h1.5 r180
Q5: Top Overlay "1" at 189.362,199.637 h1.5 r180; Top Overlay "2" at 187.072,199.637 h1.5 r180; Top Overlay "3" at 184.532,199.637 h1.5 r180
Q6: Top Overlay "1" at 189.308,226.637 h1.5 r180; Top Overlay "2" at 187.018,226.637 h1.5 r180; Top Overlay "3" at 184.478,226.637 h1.5 r180
Q7: Top Overlay "1" at 142.08,199.907 h1.5 r180; Top Overlay "2" at 139.79,199.907 h1.5 r180; Top Overlay "3" at 137.25,199.907 h1.5 r180
Q8: Top Overlay "1" at 142.042,226.657 h1.5 r180; Top Overlay "2" at 139.752,226.657 h1.5 r180; Top Overlay "3" at 137.212,226.657 h1.5 r180
Q9: Top Overlay "1" at 93.54,199.675 h1.5 r180; Top Overlay "2" at 91.25,199.675 h1.5 r180; Top Overlay "3" at 88.71,199.675 h1.5 r180
Q10: Top Overlay "1" at 93.442,226.637 h1.5 r180; Top Overlay "2" at 91.152,226.637 h1.5 r180; Top Overlay "3" at 88.612,226.637 h1.5 r180
Q11: Top Overlay "1" at 46.29,199.675 h1.5 r180; Top Overlay "2" at 44,199.675 h1.5 r180; Top Overlay "3" at 41.46,199.675 h1.5 r180
Q12: Top Overlay "1" at 46.29,226.425 h1.5 r180; Top Overlay "2" at 44,226.425 h1.5 r180; Top Overlay "3" at 41.46,226.425 h1.5 r180